# Altium PCB PCB_rond.PcbDoc
Units mil, origin at the board's own origin, x right, y up, seen from the top; angles counter-clockwise.
Board outline 4094.49 x 4094.49 mil, 2 copper layers (Top Layer, Bottom Layer); 14 components, 32 nets, 68 pads, 15 vias.
Unrouted connection lines stored in the file: 1.
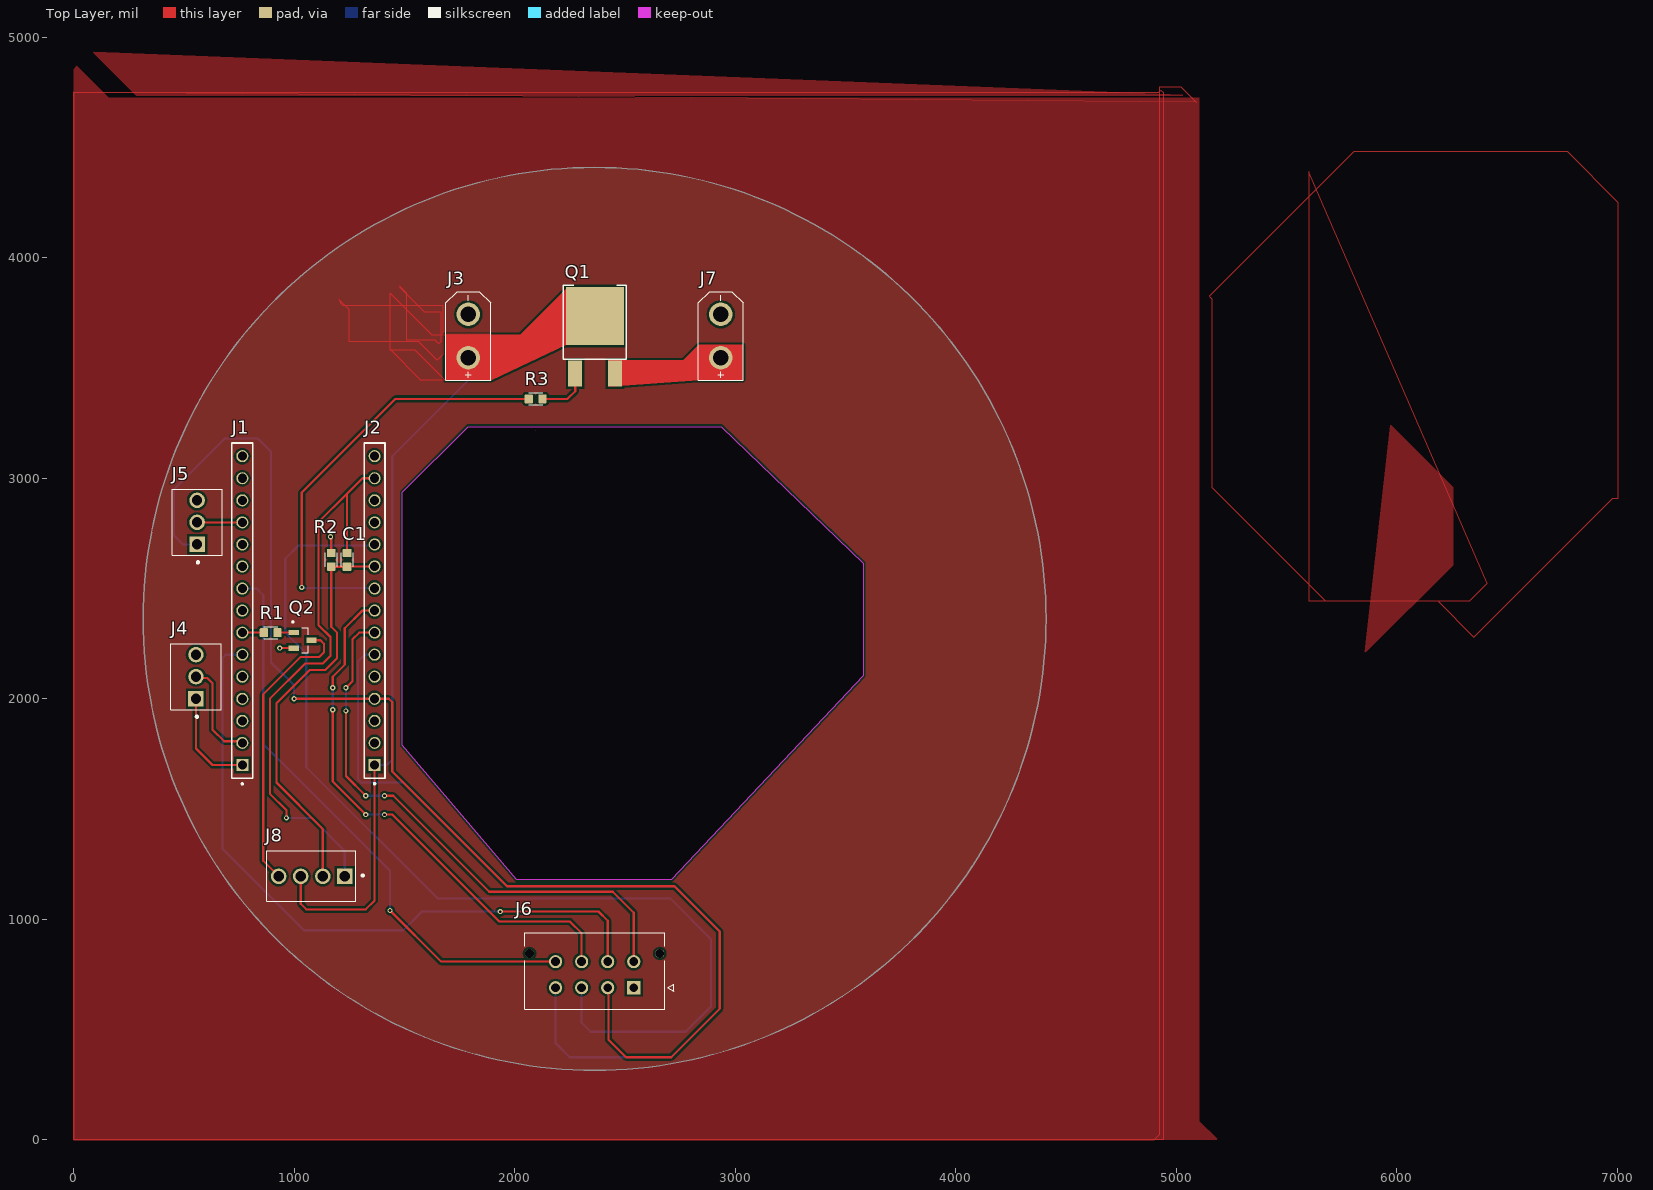
[diagram p0: Top Layer view]
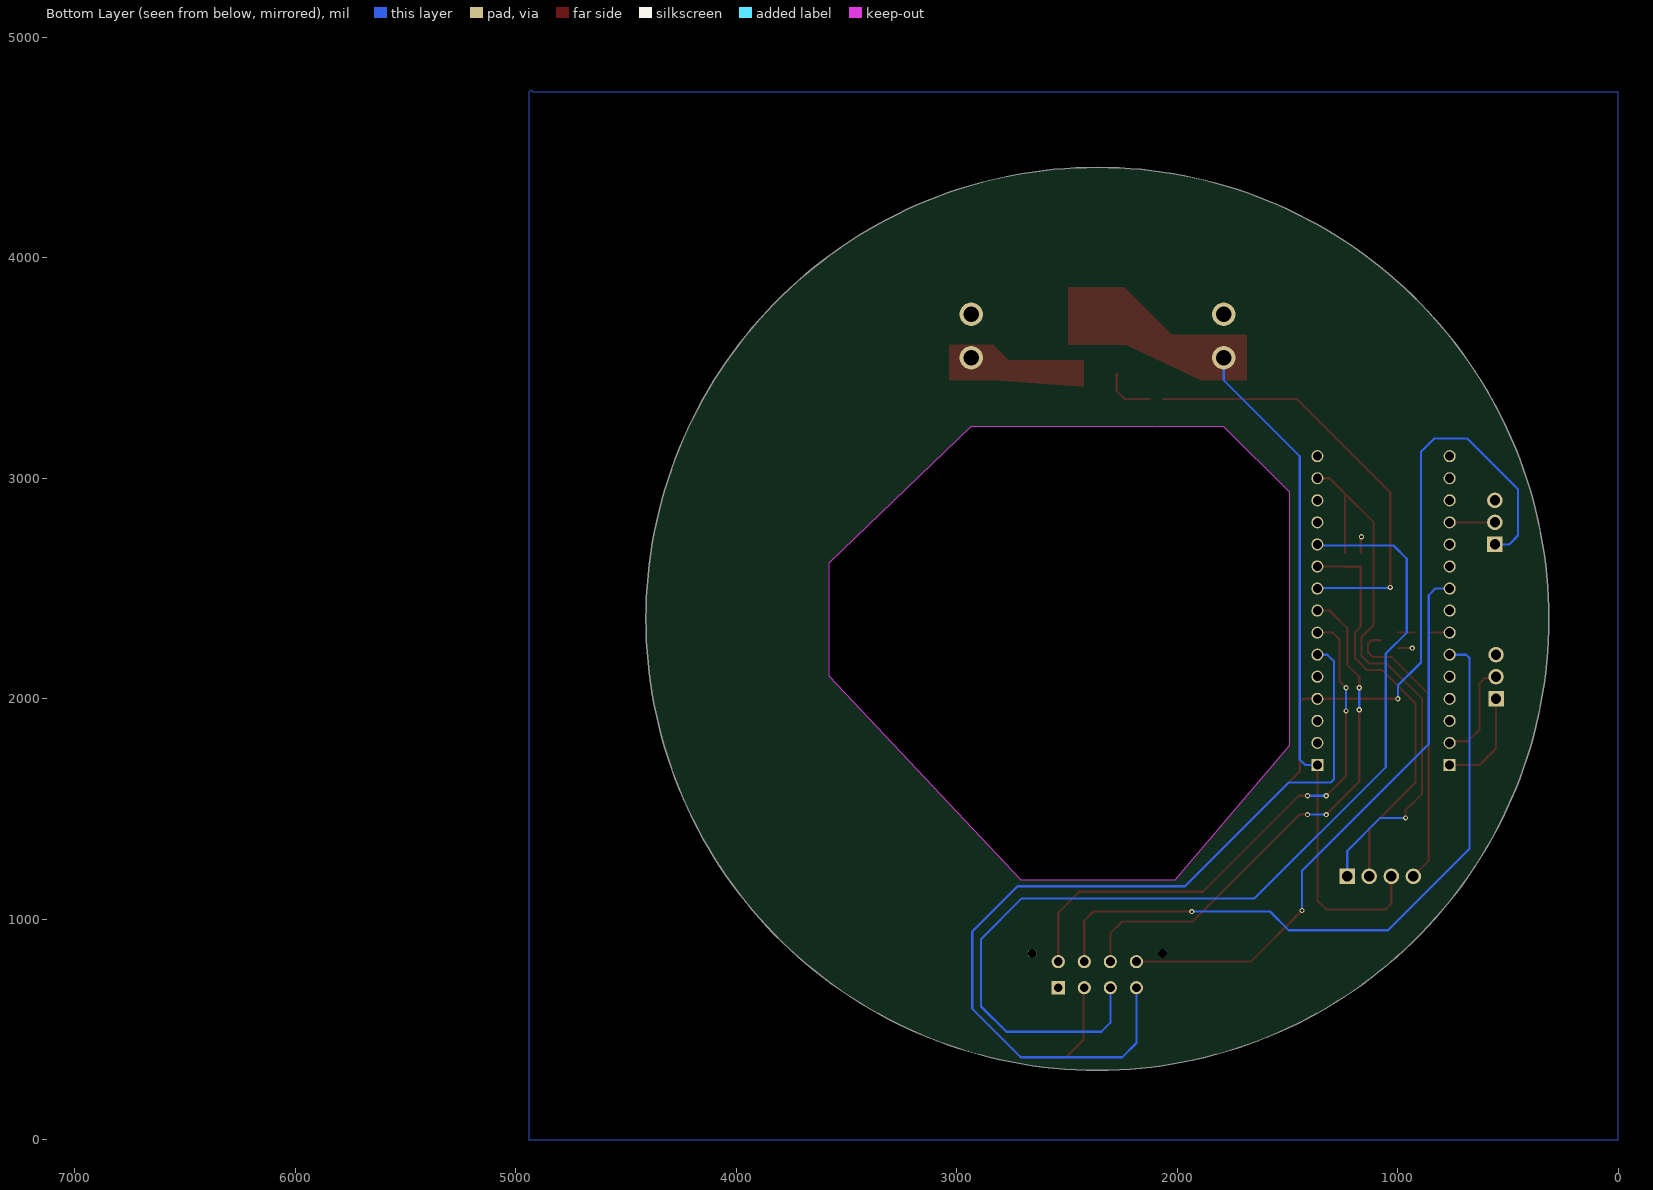
[diagram p1: Bottom Layer view, seen from below]
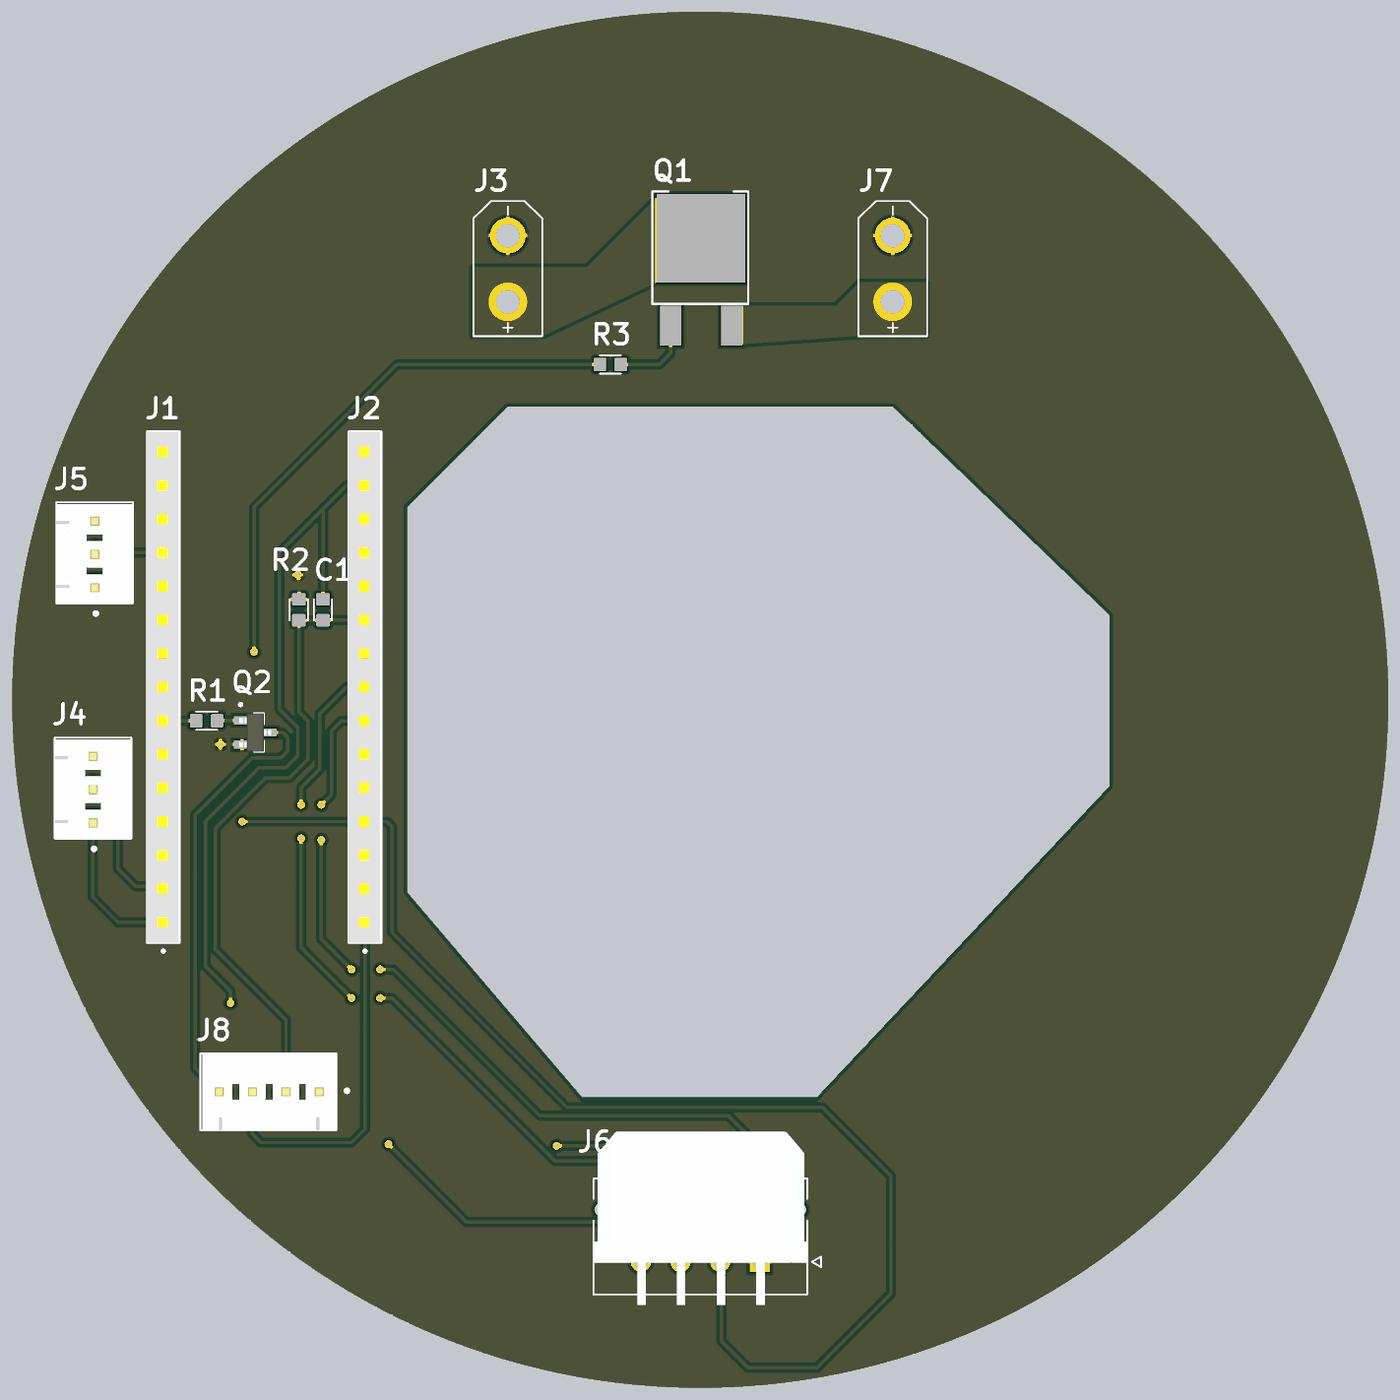
[diagram p2: 3D render of the assembled board from above, using the file's embedded part models]

## Layer stack, top to bottom
Top Solder: solder mask 0.4, Solder Resist, Dk 3.5
Top Layer: signal copper 1.4
Dielectric 1: dielectric 12.6, FR-4, Dk 4.8
Bottom Layer: signal copper 1.4
Bottom Solder: solder mask 0.4, Solder Resist, Dk 3.5

## Board outline
2362.45,315.21 cw(c2362.45,2362.45) 315.21,2362.45 cw(c2362.45,2362.45) 2362.45,4409.7 cw(c2362.45,2362.45) 4409.7,2362.45 cw(c2362.45,2362.45)
cut-out: 2095,3215
cut-out: 1490.41,1789.06 1490.41,2935.85 1789.06,3234.5 2935.85,3234.5 3580,2615 3580,2105 2710,1180 2010,1180

## Design rules (kind name [scope] priority, off if disabled: settings)
Clearance [All] p1: gap=10 ignorepadtopadclearanceinfootprint=FALSE except(0: Arc-Hole Track-Hole SMDPad-Hole THPad-Hole Via-Hole Fill-Hole Poly-Hole Region-Hole Text-Hole)
PlaneConnect [All] p1: planeconnectstyle=Direct reliefexpansion=20 reliefentries=4 reliefconductorwidth=10 reliefairgap=10
PolygonConnect [All] p1: connectstyle=Direct reliefconductorwidth=10 reliefentries=4 polygonreliefangle="90 Angle" airgapwidth=10
RoutingVias [All] p1: holewidth=28 width=50 viastyle="Through Hole" minholewidth=28 minwidth=50 maxholewidth=28 maxwidth=50
SolderMaskExpansion [All] p1: expansion=4 istentingtop=FALSE
Width [All] p1: maxlimit=10 minlimit=10 preferedwidth=10
29 further rules are at their usual default settings.

## Classes and differential pairs
component class Schematic_MASTER: C1 J1 J2 J3 J5 J6 J7 J8 Q1 Q2 R1 R2 R3

## Components (designator, comment, footprint, x,y, rotation, side; value= is the part's Value field where it differs from the comment)
C1 "C_0603" C_0603 1240,2630 r90 top
J1 "SSW-115-02-T-S" SSW-115-02-T-S 765,1700 r90 top
J2 "SSW-115-02-T-S" SSW-115-02-T-S 1365,1700 r90 top
J3 "XT30UPB_M" XT30UPB-M 1790,3645 r90 top
J4 "22-27-2031" 22-27-2031 555,2100 r90 top
J5 "22-27-2031" 22-27-2031 560,2800 r90 top
J6 "430450812" 430450812 2540,690 r0 top
J7 "XT30UPB_M" XT30UPB-M 2935,3645 r90 top
J8 "22-27-2041" 22-27-2041 1080,1195 r180 top
Q1 "STD65N55F3" STD65N55F3 2365,3570 r0 top
Q2 "BC817-25LT1G" SOT_BC817 1038.62,2265 r270 top
R1 "1k" R_0603 893.77,2300 r0 top
R2 "10k" R_0603 1168.18,2630 r270 top
R3 "1k" R_0603 2095,3360 r0 top

## Footprints (in the part's own frame and the unit in brackets; to place one, negate y for a bottom-side part, rotate by r counter-clockwise, add the part's x,y. Pads: shape width x height; smd on the part's side, far side on the other; paste and mask are expansions set on the pad)
22-27-2031 [mm]
  rect 1.785x1.785 / inner round 1.785 / far side rect 1.785x1.785 hole 1.19: 1(-2.54,0)
  round 1.785 hole 1.19: 2(0,0) 3(2.54,0)
  silkscreen extent -4.7,-2.92 3.81,2.88, body extent -3.92,-2.92 3.66,2.88, height 11.7
22-27-2041 [mm]
  rect 1.785x1.785 / inner round 1.785 / far side rect 1.785x1.785 hole 1.19: 1(-3.81,0)
  round 1.785 hole 1.19: 2(-1.27,0) 3(1.27,0) 4(3.81,0)
  silkscreen extent -5.97,-2.92 5.21,2.88, body extent -5.05,-2.92 5.05,2.88, height 11.7
430450812 [mm]
  rect 1.52x1.52 / inner round 1.52 / far side rect 1.52x1.52 hole 1.02 mask+0.076: 1(0,0)
  round 1.52 hole 1.02 mask+0.076: 2(-3,0) 3(-6,0) 4(-9,0) 5(0,3) 6(-3,3) 7(-6,3) 8(-9,3)
  round 1.02 hole 1.02 unplated mask+0.076: ""(-12,3.94) ""(3,3.94)
  silkscreen extent -12.57,-2.47 4.63,6.3, body extent -12.52,-2.54 3.63,6.23, height 9.91
C_0603 [mm]
  rrect20% 0.94x1.02 smd: 1(-0.79,0) 2(0.79,0)
  silkscreen extent -0.8,-0.69 0.8,0.69
R_0603 [mm]
  rrect20% 0.94x1.02 smd: 1(-0.79,0) 2(0.79,0)
  silkscreen extent -0.8,-0.69 0.8,0.69
SOT_BC817 [mm]
  rect 0.61x1.18 smd: 1(-0.915,-1.025) 2(0.915,-1.025) 3(0,1.025)
  silkscreen extent -2.21,-1.21 1.45,0.65, body extent -1.45,-1.2 1.45,1.2, height 1.15
SSW-115-02-T-S [mm]
  rect 1.39x1.39 / inner round 1.39 / far side rect 1.39x1.39 hole 1.04: 01(0,0)
  round 1.39 hole 1.04: 02(2.54,0) 03(5.08,0) 04(7.62,0) 05(10.16,0) 06(12.7,0) 07(15.24,0) 08(17.78,0) 09(20.32,0) 10(22.86,0) 11(25.4,0) 12(27.94,0) 13(30.48,0) 14(33.02,0) 15(35.56,0)
  silkscreen extent -2.27,-1.21 37.09,1.21, body extent -1.52,-1.14 37.08,1.27, height 8.51
STD65N55F3 [mm]
  rect 1.6x3 smd: 1(-2.3,-2.4) 3(2.3,-2.4)
  rect 6.7x6.7 smd: 2(0,4.191)
  silkscreen extent -3.68,-0.76 3.56,7.75
XT30UPB-M [mm]
  round 2.7 hole 1.8: 1(-2.5,0) 2(2.5,0)
  silkscreen extent -5.1,-2.6 5.1,2.6

## Part data
C1: "SMD capacitor 0603"
Q2: "Transistor NPN 45V 0.5A hfe160 SOT23", Package="SOT-23-3 ON Semiconductor", Check_prices=https://www.snapeda.com/parts/BC817-25LT1G/Onsemi/view-part/?ref=eda, MF="ON Semiconductor", MP=BC817-25LT1G, SnapEDA_Link=https://www.snapeda.com/parts/BC817-25LT1G/Onsemi/view-part/?ref=snap
R1 R2 R3: library part R_0603, "Res 0603"

## Via types
v1: diameter 23.62, hole 11.81, Top Layer to Bottom Layer, 15 vias

## Nets (pads, with @x,y where several pads share a name; then routed paths per layer and width w, separated by ;. In a path a pad name is that pad's centre, name@x,y a point inside that pad or via, vN(x,y) a via of type N, cw(c..) or ccw(c..) an arc to the next point about the centre after c; other vN are vias at no path point)
3V3: C1.2 J2.14 J8.1 | length 2603.5
  Top Layer w10: v1(965,1460) 965,1495 890,1570 890,2000 1050,2160 1130,2160 1165,2195 1165,2280 1110,2335 1110,2800 1240,2930 ; C1.2 1240,2930 ; J2.14 1310,3000 1240,2930
  Bottom Layer w10: v1(965,1460) 1080,1460 1230,1310 J8.1
+5: J2.04 J5.1 J6.2 | length 5831
  Top Layer w10: v1(1000,2000) J2.04 1429.14,2000 1445,1984.14 1445,1670 1965,1150 2725,1150 2930,945 2930,595 2710,375 2505,375 2425,455 2425,686.89 J6.2
  Bottom Layer w10: J5.1 495,2700 455,2740 455,2950 685,3180 835,3180 895,3120 895,2165 1000,2060 v1(1000,2000) ; J6.2 J6.2@2428.44,683.44
+12: J2.01 J3.1 J8.3 Q1.2 | length 3156.8
  Top Layer w10: J8.3 1030,1070 1055,1045 1325,1045 1365,1085 J2.01
  Bottom Layer w10: J2.01 1420,1700 1445,1725 1445,3100 1790,3445 J3.1
AREF: J2.13
GND: J1.04 J2.02 J3.2 J4.3 J5.3 J6.1 J7.2 Q2.2 R2.1 | length 138.9
  Top Layer w10: v1(935,2230) 997.24,2230 Q2.2 ; v1(1165,2735) 1168.18,2731.82 R2.1
NetJ7_1: J7.1 Q1.3
NetJ8_4: J8.4 Q2.3 | length 1309.9
  Top Layer w10: J8.4 860,1265 860,2020 1030,2190 1115,2190 1135,2210 1135,2250 1120,2265 Q2.3
NetQ1_1: Q1.1 R3.2 | length 243.7
  Top Layer w10: R3.2 2240,3360 2274.45,3394.45 Q1.1
NetQ2_1: Q2.1 R1.2 | length 73.8
  Top Layer w10: R1.2 925.9,2301.02 Q2.1
NRST: J1.03 J2.03
PA0: J2.12
PA1/SPI_CLK: J2.11 J6.3 | length 4689.1
  Bottom Layer w10: J2.11 1360,2695 1020,2695 960,2635 960,2300 1055,2205 1055,1690 1650,1095 2705,1095 2890,910 2890,605 2775,490 2345,490 2303.78,531.22 J6.3
PA2: J2.05
PA3/BTN: C1.1 J2.10 J8.2 R2.2 | length 1854.2
  Top Layer w10: J8.2 1130,1410 920,1620 920,1980 1070,2130 1140,2130 1195,2185 1195,2300 1168.18,2326.82 R2.2 C1.1 1240.55,2599.45 1364.45,2599.45 J2.10
PA4/MOS_ALIM: J2.09 R3.1 | length 1967
  Top Layer w10: v1(1035,2505) 1035,2935 1460,3360 R3.1
  Bottom Layer w10: v1(1035,2505) 1037.5,2502.5 1362.5,2502.5 J2.09
PA5/CS: J2.08 J6.7 | length 2428.1
  Top Layer w10: v1(1175,1950) 1175,1625 v1(1325,1475) ; v1(1175,2050) 1175,2100 1230,2155 1230,2320 1310,2400 J2.08 ; v1(1410,1475) 1445,1475 1930,990 2250,990 2303.78,936.22 J6.7
  Bottom Layer w10: v1(1175,1950) v1(1175,2050) ; v1(1325,1475) v1(1410,1475)
PA6/RST: J2.07 J6.5 | length 2528.6
  Top Layer w10: v1(1235,1945) 1235,1650 v1(1325,1560) ; v1(1235,2050) 1265,2080 1265,2270 1295,2300 J2.07 ; v1(1410,1560) 1450,1560 1885,1125 2445,1125 2540,1030 J6.5
  Bottom Layer w10: v1(1235,1945) v1(1235,2050) ; v1(1325,1560) v1(1410,1560)
PA7/SPI_MOSI: J2.06 J6.4 | length 4011
  Bottom Layer w10: J2.06 1320,2200 1290,2170 1290,1635 1305,1620 1495,1620 1965,1150 2725,1150 2930,945 2930,595 2710,375 2250,375 2185.67,439.33 J6.4
PA8/TIM1_CH1: J1.12 J5.2 | length 205
  Top Layer w10: J5.2 J1.12
PA9/UART_TX: J1.01 J4.1 | length 466.1
  Top Layer w10: J4.1 555,1775 630,1700 J1.01
PA10/UART_RX: J1.02 J4.2 | length 457.5
  Top Layer w10: J4.2 560.14,2094.86 605.14,2094.86 630,2070 630,1860 682.64,1807.36 757.64,1807.36 J1.02
  Bottom Layer w10: J4.2 J4.2@555.14,2099.86
PA11: J1.13
PA12: J1.05
PB0/DC: J1.06 J6.6 | length 3098.9
  Top Layer w10: v1(1935,1035) 2380,1035 2421.89,993.11 J6.6
  Bottom Layer w10: J1.06 690,2200 675,2185 675,1320 1045,950 1495,950 1580,1035 v1(1935,1035)
PB1/BLK: J1.09 J6.8 | length 2622.3
  Top Layer w10: v1(1435,1040) 1666.89,808.11 J6.8
  Bottom Layer w10: J1.09 830,2500 860,2470 860,1795 1435,1220 v1(1435,1040)
PB3: J2.15
PB4: J1.15
PB5: J1.14
PB6: J1.08
PB7/BTN_LED: J1.07 R1.1 | length 97.7
  Top Layer w10: J1.07 R1.1
PC14: J1.10
PC15: J1.11
pads on no net: J6.

## Polygon pours and split planes (outlines as drawn)
no net on Top Layer "NONET_L01_P014" (solid, pour order 14): 85,4935 285,4735 5105,4735 5105,85 5190,0 0,0 0,4855 15,4870 160,4725 5410,4725
no net on Top Layer "NONET_L01_P013" (solid, pour order 13): 0,4750 0,0 4900,0 4925,25 4925,4775 5020,4775 5090,4705
no net on Top Layer "NONET_L01_P012" (solid, pour order 12): 5970,3245 6255,2960 6255,2605 5855,2205
no net on Top Layer "NONET_L01_P011" (solid, shelved, pour order 11): 5600,4390 5600,2445 6185,2445 6350,2280 6980,2910 7005,2910 7005,4250 6775,4480 5805,4480 5150,3825 5160,3815 5160,2960 5675,2445 6330,2445 6410,2525
no net on Top Layer "NONET_L01_P010" (solid, shelved, pour order 10): 1210,3795 1220,3785 1675,3785 1675,3560 1650,3535 1565,3620 1250,3620 1250,3765 1205,3810
no net on Top Layer "NONET_L01_P009" (solid, shelved, pour order 9): 1480,3865 1590,3755 1665,3755 1665,3620 1655,3610 1640,3625 1510,3625 1510,3840 1480,3870
no net on Top Layer "NONET_L01_P008" (solid, shelved, pour order 8): 1435,3840 1625,3650 1895,3650 1890,3645 1890,3445 1685,3445 1550,3580 1435,3580 1435,3840 1625,3650 1685,3650 1690,3655 1890,3655 1890,3450 1895,3445 1575,3445 1435,3585
GND on Top Layer "NONET_L01_P007" (solid, shelved, pour order 7): 0,4750 4920,4750 4930,4760 4940,4750 4940,0 0,0
no net on Top Layer "NONET_L01_P001" (solid, shelved, pour order 1): 0,4015
no net on Top Layer "NONET_L01_P000" (solid, shelved, pour order 0): 895,4135
GND on Bottom Layer "NONET_L02_P006" (solid, remove dead copper, shelved, pour order 6): 0,4750 4920,4750 4930,4760 4940,4750 4940,0 0,0

## Other copper
Top Layer:
  region net NetJ7_1: 2425,3535 2765,3535 2835,3605 3035,3605 3035,3445 2835,3445 2425,3415.71
  region net +12: 2025,3650 2240,3865 2495,3865 2495,3605 2235,3605 1895,3445 1685,3445 1685,3650 1685.8,3624.31 1685,3650

## Silkscreen, mask and mechanical layers (free items; w line width, h text height)
Mechanical 1:
  circle w19.59: c2360.13,2359.74 r2036.79
  circle w19.59: c4318.59,4318.19 r80.3
  circle w19.59: c4318.59,401.29 r80.3
  circle w19.59: c401.68,4318.19 r80.3
  circle w19.59: c401.68,401.29 r80.3
  lines w19.59: 1477.54,1914.27 1477.54,3055.2 ; 1492.54,1789.27 1789.67,1492.14 2930.6,1492.14 3227.73,1789.27 3227.73,2930.2 2930.6,3227.33 1789.67,3227.33 1492.54,2930.2 ; 2007.61,1217.96 2712.65,1766.33 ; 2007.61,1766.33 2712.65,1217.96 ; 2360.13,1178.79 2360.13,1492.14 ; 2360.13,1178.79 2712.65,1178.79 2712.65,1492.14 2360.13,1492.14 ; 2360.13,1178.79 2360.13,1492.14 ; 2360.13,1178.79 2007.61,1178.79 2007.61,1492.14 2360.13,1492.14 ; 2875.21,2105.14 3580.25,2614.34 ; 2875.21,2105.14 3580.25,2105.14 ; 2875.21,2105.14 2875.21,2614.34 ; 2875.21,2614.34 3580.25,2105.14 ; 2875.21,2614.34 3580.25,2614.34 ; 3580.25,2105.14 3580.25,2614.34 ; 9.99,597.13 ccw(c597.78,597.38) 597.53,9.6 4122.74,9.6 ccw(c4122.49,597.38) 4710.28,597.13 4710.28,4122.35 ccw(c4122.49,4122.09) 4122.74,4709.88 597.53,4709.88 ccw(c597.78,4122.09) 9.99,4122.34 9.99,597.13
  lines w47.24: 315.21,2362.45 cw(c2362.45,2362.45) 2362.45,4409.7 cw(c2362.45,2362.45) 4409.7,2362.45 cw(c2362.45,2362.45) 2362.45,315.21 cw(c2362.45,2362.45) 315.21,2362.45